# Altium PCB MCU089B.PcbDoc (part 2 of 5)
Units mil, origin at the board's own origin, x right, y up, seen from the top; angles counter-clockwise.
Board outline 2300 x 5500 mil, 4 copper layers (Top Signal, GND, PWR, Bottom Signal), stack 61.6 mil thick; 261 components, 208 nets, 964 pads, 377 vias.
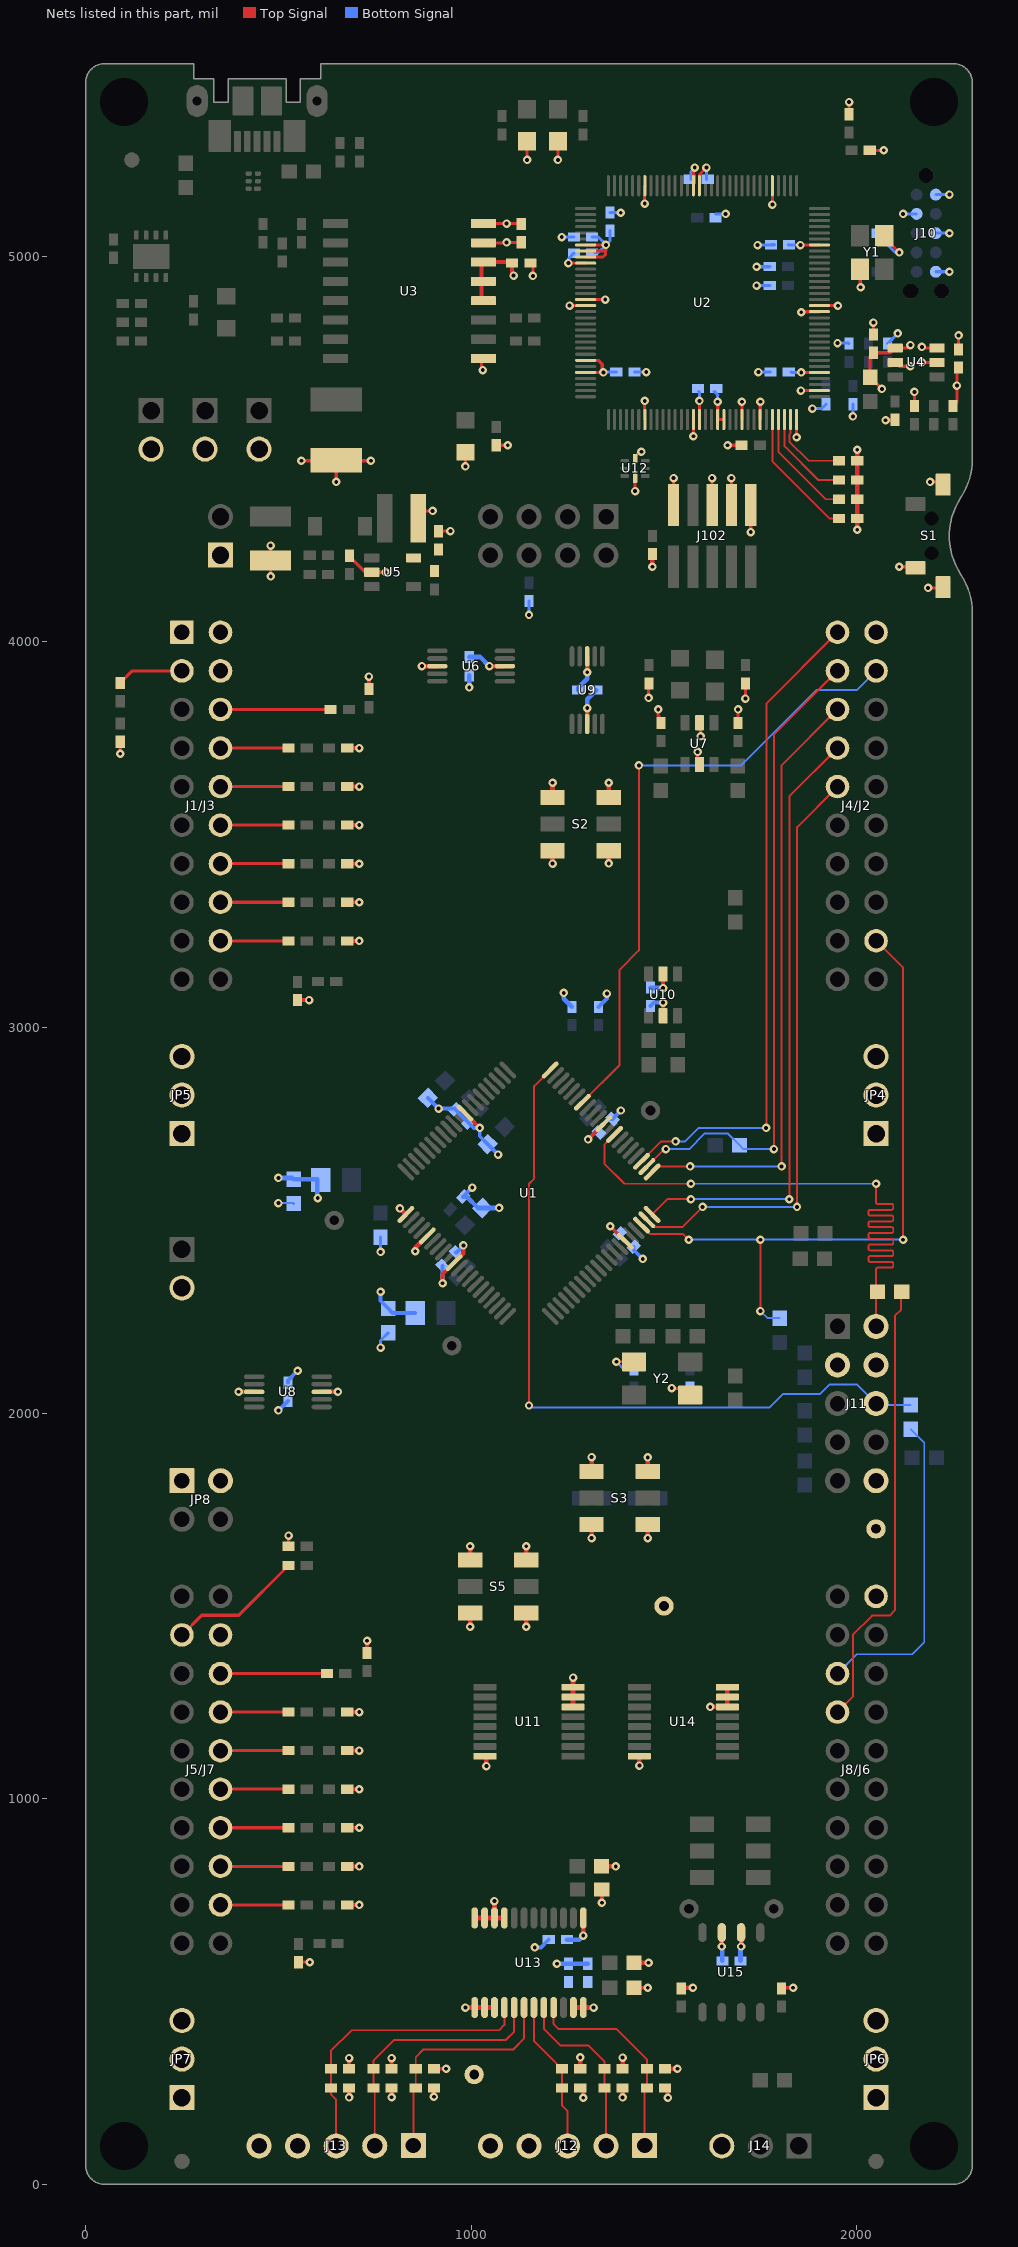
[diagram p4: the nets of this part, all layers, seen from the top]

## Part data
C1 C2 C6 C10 C11 C12 C13 C14 C17 C20 C21 C22 C23 C43 C44 C45 C46 C49 C64 C65 C74 C105 C106: library part CMP-0006629-2, "CAP, CERM, 0.1 uF, 10 V, +/- 10%, X7R, 0402", Cap_Case=0402, Manufacturer=MuRata, Supplier Part Number 1=GRM155R71A104KA01D-ND, TempCo=X7R, Tolerance_%=10%, Value1=Unknown, Value2=10V, ValueDisplayed=0.1uF, AEC Category=Q200, AEC Qualified=?, Cap_F=100nF, ComponentLink1Description="Datasheet link", ComponentLink1URL=http://search.murata.co.jp/Ceramy/PnsearchViewAction.do?HnOFG=ON&HnNFG=ON&SEL_CNT=50&sLang=en&sKey=GRM155R71A104KA01D&x=9&y=9&search=startwith, CompType=Capacitor, LatestRevisionDate=2017-03-09, MountType=SMT, PackageReference=0402, PartNumber=GRM155R71A104KA01D, Polarized=N, Published=2008-06-19, Publisher="Texas Instruments", RoHS=Y, SizeArea_mm2=0.5, SizeAreaWB_mm2=3, SizeX_mm=1, SizeY_mm=0.5, SizeZ_mm=0.6, Supplier 1=Digi-Key, Supplier 2=Newark, Supplier 3=Mouser, Supplier Part Number 2=14T3278, Supplier Part Number 3=81-GRM155R71A104KA1D, TaMax_C=125癈, TaMin_C=-55癈, Technology=Ceramic, U/M=EA, VDC_V=10V
C3: library part CMP-0006404-2, "CAP, CERM, 820 pF, 25 V, +/- 5%, C0G/NP0, 0402", Cap_Case=0402, Manufacturer=MuRata, Supplier Part Number 1=GRM1555C1E821JA01D-ND, TempCo=C0G/NP0, Tolerance_%=5%, Value1=Unknown, Value2=25V, ValueDisplayed=820pF, AEC Category=Q200, AEC Qualified=?, Cap_F=820pF, ComponentLink1Description="Datasheet link", ComponentLink1URL=http://search.murata.co.jp/Ceramy/PnsearchViewAction.do?HnOFG=ON&HnNFG=ON&SEL_CNT=50&sLang=en&sKey=GRM1555C1E821JA01D&x=9&y=9&search=startwith, CompType=Capacitor, LatestRevisionDate=2017-03-09, MountType=SMT, PackageReference=0402, PartNumber=GRM1555C1E821JA01D, Polarized=N, Published=2008-06-19, Publisher="Texas Instruments", RoHS=Y, SizeArea_mm2=0.5, SizeAreaWB_mm2=3, SizeX_mm=1, SizeY_mm=0.5, SizeZ_mm=0.6, Supplier 1=Digi-Key, Supplier 2=Mouser, Supplier Part Number 2=81-GRM1555C1E821JA1D, TaMax_C=125癈, TaMin_C=-55癈, Technology=Ceramic, U/M=EA, VDC_V=25V
C4: library part CMP-0064938-2, "CAP, CERM, 10 uF, 25 V,+/- 10%, X7R, 1210", Cap_Case=1210, Manufacturer="Wurth Elektronik", Supplier Part Number 1=732-7729-1-ND, TempCo=X7R, Tolerance_%=10%, Value1=Unknown, Value2=25V, ValueDisplayed=10uF, AEC Category=Q200, AEC Grade=N/A, AEC Qualified=N, Cap_F=10礔, ComponentLink1Description="Datasheet link", ComponentLink1URL=http://katalog.we-online.de/pbs/datasheet/885012209028.pdf, CompType=Capacitor, LatestRevisionDate=2017-06-05, MountType=SMT, PackageReference=1210, PartNumber=885012209028, Polarized=N, Published=2008-06-19, Publisher="Texas Instruments", RoHS=Y, SizeArea_mm2=8, SizeAreaWB_mm2=14.7, SizeX_mm=3.2, SizeY_mm=2.5, SizeZ_mm=2.2, Supplier 1=Digi-Key, Supplier 2=Newark, Supplier 3=Mouser, Supplier Part Number 2=40Y4457, Supplier Part Number 3=710-885012209028, TaMax_C=125癈, TaMin_C=-55癈, Technology=Ceramic, U/M=EA, VDC_V=25V
C5: library part CMP-0006220-2, "CAP, CERM, 4.7 uF, 6.3 V, +/- 20%, X5R, 0402", Cap_Case=0402, Manufacturer="Wurth Elektronik", Supplier Part Number 1=732-7485-1-ND, TempCo=X5R, Tolerance_%=20%, Value1=Unknown, Value2=6.3V, ValueDisplayed=4.7uF, AEC Category=Q200, AEC Grade=N/A, AEC Qualified=N, Cap_F=4.7礔, ComponentLink1Description="Datasheet link", ComponentLink1URL=http://katalog.we-online.de/pbs/datasheet/885012105008.pdf, CompType=Capacitor, LatestRevisionDate=2017-03-09, MountType=SMT, PackageReference=0402, PartNumber=885012105008, Polarized=N, Published=2008-06-19, Publisher="Texas Instruments", RoHS=Y, SizeArea_mm2=0.5, SizeAreaWB_mm2=3, SizeX_mm=1, SizeY_mm=0.5, SizeZ_mm=0.6, Supplier 1=Digi-Key, Supplier 2=Mouser, Supplier Part Number 2=710-885012105008, TaMax_C=85癈, TaMin_C=-55癈, Technology=Ceramic, U/M=EA, VDC_V=6.3V
C7 C8 C50 C51 C52 C53 C58: library part CMP-0006658-2, "CAP, CERM, 0.01 uF, 25 V, +/- 10%, X7R, 0402", Cap_Case=0402, Manufacturer=MuRata, Supplier Part Number 1=490-1312-1-ND, TempCo=X7R, Tolerance_%=10%, Value1=Unknown, Value2=25V, ValueDisplayed=0.01uF, AEC Category=Q200, AEC Qualified=?, Cap_F=10nF, ComponentLink1Description="Datasheet link", ComponentLink1URL=http://search.murata.co.jp/Ceramy/PnsearchViewAction.do?HnOFG=ON&HnNFG=ON&SEL_CNT=50&sLang=en&sKey=GRM155R71E103KA01D&x=9&y=9&search=startwith, CompType=Capacitor, LatestRevisionDate=2017-03-09, MountType=SMT, PackageReference=0402, PartNumber=GRM155R71E103KA01D, Polarized=N, Published=2008-06-19, Publisher="Texas Instruments", RoHS=Y, SizeArea_mm2=0.5, SizeAreaWB_mm2=3, SizeX_mm=1, SizeY_mm=0.5, SizeZ_mm=0.6, Supplier 1=Digi-Key, Supplier 2=Mouser, Supplier 3=Farnell, Supplier Part Number 2=81-GRM36X103K25, Supplier Part Number 3=8819734, TaMax_C=125癈, TaMin_C=-55癈, Technology=Ceramic, U/M=EA, VDC_V=25V
C9 C18 C19: library part CMP-0007318-5, "CAP, CERM, 10 uF, 10 V, +/- 20%, X5R, 0603", Cap_Case=0603, Manufacturer=MuRata, TempCo=X5R, Tolerance_%=20%, Value1=Unknown, Value2=10V, ValueDisplayed=10uF, AEC Category=Q200, AEC Qualified=?, Cap_F=10礔, ComponentLink1Description="Datasheet link", ComponentLink1URL=http://psearch.murata.com/capacitor/product/GRM188R61A106ME69%23.pdf, CompType=Capacitor, LatestRevisionDate=2017-03-09, MountType=SMT, PackageReference=0603, PartNumber=GRM188R61A106ME69D, Polarized=N, Published=2008-06-19, Publisher="Texas Instruments", RoHS=Y, SizeArea_mm2=1.28, SizeAreaWB_mm2=4.68, SizeX_mm=1.6, SizeY_mm=0.8, SizeZ_mm=1, TaMax_C=85癈, TaMin_C=-55癈, Technology=Ceramic, U/M=EA, VDC_V=10V
C15 C16: library part CMP-0007323-5, "CAP, CERM, 2.2 uF, 10 V, +/- 10%, X5R, 0603", Cap_Case=0603, Manufacturer=MuRata, Supplier Part Number 1=490-1545-1-ND, TempCo=X5R, Tolerance_%=10%, Value1=Unknown, Value2=10V, ValueDisplayed=2.2uF, AEC Category=Q200, AEC Qualified=?, Cap_F=2.2礔, ComponentLink1Description="Datasheet link", ComponentLink1URL=http://search.murata.co.jp/Ceramy/PnsearchViewAction.do?HnOFG=ON&HnNFG=ON&SEL_CNT=50&sLang=en&sKey=GRM188R61A225KE34D&x=9&y=9&search=startwith, CompType=Capacitor, LatestRevisionDate=2017-03-09, MountType=SMT, PackageReference=0603, PartNumber=GRM188R61A225KE34D, Polarized=N, Published=2008-06-19, Publisher="Texas Instruments", RoHS=Y, SizeArea_mm2=1.28, SizeAreaWB_mm2=4.68, SizeX_mm=1.6, SizeY_mm=0.8, SizeZ_mm=1, Supplier 1=Digi-Key, Supplier 2=Mouser, Supplier 3=Farnell, Supplier Part Number 2=81-GRM188R61A225KE34, Supplier Part Number 3=1828799, TaMax_C=85癈, TaMin_C=-55癈, Technology=Ceramic, U/M=EA, VDC_V=10V
C24: library part CMP-0007323-5, "CAP, CERM, 2.2 uF, 10 V, +/- 10%, X5R, 0603", Cap_Case=0603, Manufacturer=MuRata, Supplier Part Number 1=490-1545-1-ND, TempCo=X5R, Tolerance_%=10%, Value1=Unknown, Value2=10V, AEC Category=Q200, AEC Qualified=?, Cap_F=2.2礔, ComponentLink1Description="Datasheet link", ComponentLink1URL=http://search.murata.co.jp/Ceramy/PnsearchViewAction.do?HnOFG=ON&HnNFG=ON&SEL_CNT=50&sLang=en&sKey=GRM188R61A225KE34D&x=9&y=9&search=startwith, CompType=Capacitor, LatestRevisionDate=2017-03-09, MountType=SMT, PackageReference=0603, PartNumber=GRM188R61A225KE34D, Polarized=N, Published=2008-06-19, Publisher="Texas Instruments", RoHS=Y, SizeArea_mm2=1.28, SizeAreaWB_mm2=4.68, SizeX_mm=1.6, SizeY_mm=0.8, SizeZ_mm=1, Supplier 1=Digi-Key, Supplier 2=Mouser, Supplier 3=Farnell, Supplier Part Number 2=81-GRM188R61A225KE34, Supplier Part Number 3=1828799, TaMax_C=85癈, TaMin_C=-55癈, Technology=Ceramic, U/M=EA, VDC_V=10V
C25 C26 C27 C28 C29 C30 C31 C32 C33 C34 C35 C36 C37 C38 C39 C40: library part CMP-0006249-2, "CAP, CERM, 220 pF, 50 V, +/- 1%, C0G/NP0, 0402", Cap_Case=0402, Manufacturer=TDK, Supplier Part Number 1=445-7015-1-ND, TempCo=C0G/NP0, Tolerance_%=1%, Value1=Unknown, Value2=50V, ValueDisplayed=220pF, AEC Category=Q200, AEC Grade=N/A, AEC Qualified=N, Cap_F=220pF, ComponentLink1Description="Datasheet link", ComponentLink1URL=http://www.tdk.com/pdf/tight_tol_B11.pdf, CompType=Capacitor, LatestRevisionDate=2017-03-09, MountType=SMT, PackageReference=0402, PartNumber=C1005C0G1H221F050BA, Polarized=N, Published=2008-06-19, Publisher="Texas Instruments", RoHS=Y, SizeArea_mm2=0.5, SizeAreaWB_mm2=3, SizeX_mm=1, SizeY_mm=0.5, SizeZ_mm=0.6, Supplier 1=Digi-Key, Supplier 2=Newark, Supplier 3=Mouser, Supplier Part Number 2=78Y9893, Supplier Part Number 3=810-C1005C0G1H221F, TaMax_C=125癈, TaMin_C=-55癈, Technology=Ceramic, U/M=EA, VDC_V=50V
C41 C42 C62 C63: library part CMP-0006239-2, "CAP, CERM, 12 pF, 25 V, +/- 5%, C0G/NP0, AEC-Q200 Grade 1, 0402", Cap_Case=0402, Manufacturer=Kemet, Supplier Part Number 1=399-6829-1-ND, TempCo=C0G/NP0, Tolerance_%=5%, Value1=Unknown, Value2=25V, ValueDisplayed=12pF, AEC Category=Q200, AEC Grade=1, AEC Qualified=Y, Cap_F=12pF, ComponentLink1Description="Datasheet link", ComponentLink1URL=http://www.kemet.com/Lists/ProductCatalog/Attachments/420/KEM_C1022_C0G_AUTO_SMD.pdf, CompType=Capacitor, LatestRevisionDate=2017-03-09, MountType=SMT, PackageReference=0402, PartNumber=C0402C120J3GACAUTO, Polarized=N, Published=2008-06-19, Publisher="Texas Instruments", RoHS=Y, SizeArea_mm2=0.5, SizeAreaWB_mm2=3, SizeX_mm=1, SizeY_mm=0.5, SizeZ_mm=0.6, Supplier 1=Digi-Key, Supplier 2=Newark, Supplier 3=Mouser, Supplier Part Number 2=86T2558, Supplier Part Number 3=80-C0402C120J3GAUTO, TaMax_C=125癈, TaMin_C=-55癈, Technology=Ceramic, U/M=EA, VDC_V=25V
C47 C48: library part CMP-0006720-2, "CAP, CERM, 0.1 uF, 25 V, +/- 20%, X7R, 0402", Cap_Case=0402, Manufacturer="Taiyo Yuden", TempCo=X7R, Tolerance_%=20%, Value1=Unknown, Value2=25V, ValueDisplayed=0.1uF, AEC Category=Q200, AEC Grade=N/A, AEC Qualified=N, Cap_F=100nF, ComponentLink1Description="Datasheet link", ComponentLink1URL=http://www.yuden.co.jp/productdata/catalog/en/mlcc_all_e.pdf, CompType=Capacitor, LatestRevisionDate=2017-03-09, MountType=SMT, PackageReference=0402, PartNumber=TMK105B7104MV-FR, Polarized=N, Published=2008-06-19, Publisher="Texas Instruments", RoHS=Y, SizeArea_mm2=0.5, SizeAreaWB_mm2=3, SizeX_mm=1, SizeY_mm=0.5, SizeZ_mm=0.6, TaMax_C=125癈, TaMin_C=-55癈, Technology=Ceramic, U/M=EA, VDC_V=25V
C54 C55 C60 C66: library part CMP-0006623-2, "CAP, CERM, 0.1 uF, 6.3 V, +/- 10%, X7R, 0402", Cap_Case=0402, Manufacturer=MuRata, Supplier Part Number 1=GRM155R70J104KA01D-ND, TempCo=X7R, Tolerance_%=10%, Value1=Unknown, Value2=6.3V, ValueDisplayed=0.1uF, AEC Category=Q200, AEC Qualified=?, Cap_F=100nF, ComponentLink1Description="Datasheet link", ComponentLink1URL=http://search.murata.co.jp/Ceramy/PnsearchViewAction.do?HnOFG=ON&HnNFG=ON&SEL_CNT=50&sLang=en&sKey=GRM155R70J104KA01D&x=9&y=9&search=startwith, CompType=Capacitor, LatestRevisionDate=2017-03-09, MountType=SMT, PackageReference=0402, PartNumber=GRM155R70J104KA01D, Polarized=N, Published=2008-06-19, Publisher="Texas Instruments", RoHS=Y, SizeArea_mm2=0.5, SizeAreaWB_mm2=3, SizeX_mm=1, SizeY_mm=0.5, SizeZ_mm=0.6, Supplier 1=Digi-Key, Supplier 2=Mouser, Supplier Part Number 2=81-GRM155R70J104KA1D, TaMax_C=125癈, TaMin_C=-55癈, Technology=Ceramic, U/M=EA, VDC_V=6.3V
C56 C57 C61: library part CMP-0064924-2, "CAP, CERM, 1 uF, 10 V,+/- 20%, X5R, 0402", Cap_Case=0402, Manufacturer="Wurth Elektronik", Supplier Part Number 1=732-7489-1-ND, TempCo=X5R, Tolerance_%=20%, Value1=Unknown, Value2=10V, ValueDisplayed=1uF, AEC Category=Q200, AEC Grade=N/A, AEC Qualified=N, Cap_F=1礔, ComponentLink1Description="Datasheet link", ComponentLink1URL=http://katalog.we-online.de/pbs/datasheet/885012105012.pdf, CompType=Capacitor, LatestRevisionDate=2017-06-05, MountType=SMT, PackageReference=0402, PartNumber=885012105012, Polarized=N, Published=2008-06-19, Publisher="Texas Instruments", RoHS=Y, SizeArea_mm2=0.5, SizeAreaWB_mm2=3, SizeX_mm=1, SizeY_mm=0.5, SizeZ_mm=0.6, Supplier 1=Digi-Key, Supplier 2=Newark, Supplier 3=Mouser, Supplier Part Number 2=75Y5997, Supplier Part Number 3=710-885012105012, TaMax_C=85癈, TaMin_C=-55癈, Technology=Ceramic, U/M=EA, VDC_V=10V
C59 C100 C103: library part CMP-0006543-2, "CAP, CERM, 2.2 uF, 6.3 V, +/- 10%, X5R, 0402", Cap_Case=0402, Manufacturer=MuRata, Supplier Part Number 1=81-GRM155R60J225KE5D, TempCo=X5R, Tolerance_%=10%, Value1=Unknown, Value2=6.3V, ValueDisplayed=2.2uF, AEC Category=Q200, AEC Grade=N/A, AEC Qualified=N, Cap_F=2.2礔, ComponentLink1Description="Datasheet link", ComponentLink1URL=http://psearch.en.murata.com/capacitor/product/GRM155R60J225KE95%23.pdf, CompType=Capacitor, LatestRevisionDate=2017-03-09, MountType=SMT, PackageReference=0402, PartNumber=GRM155R60J225KE95D, Polarized=N, Published=2008-06-19, Publisher="Texas Instruments", RoHS=Y, SizeArea_mm2=0.5, SizeAreaWB_mm2=3, SizeX_mm=1, SizeY_mm=0.5, SizeZ_mm=0.6, Supplier 1=Mouser, TaMax_C=85癈, TaMin_C=-55癈, Technology=Ceramic, U/M=EA, VDC_V=6.3V
C67 C68 C69 C70 C71 C72 C73: library part CMP-0006231-2, "CAP, CERM, 1000 pF, 50 V, +/- 10%, X7R, 0402", Cap_Case=0402, Manufacturer="Wurth Elektronik", Supplier Part Number 1=732-7556-1-ND, TempCo=X7R, Tolerance_%=10%, Value1=Unknown, Value2=50V, ValueDisplayed=1000pF, AEC Category=Q200, AEC Grade=N/A, AEC Qualified=N, Cap_F=1nF, ComponentLink1Description="Datasheet link", ComponentLink1URL=http://katalog.we-online.de/pbs/datasheet/885012205061.pdf, CompType=Capacitor, LatestRevisionDate=2017-03-09, MountType=SMT, PackageReference=0402, PartNumber=885012205061, Polarized=N, Published=2008-06-19, Publisher="Texas Instruments", RoHS=Y, SizeArea_mm2=0.5, SizeAreaWB_mm2=3, SizeX_mm=1, SizeY_mm=0.5, SizeZ_mm=0.6, Supplier 1=Digi-Key, Supplier 2=Mouser, Supplier Part Number 2=710-885012205061, TaMax_C=125癈, TaMin_C=-55癈, Technology=Ceramic, U/M=EA, VDC_V=50V
C101: library part CMP-0006688-2, "CAP, CERM, 3300 pF, 50 V, +/- 10%, X7R, 0402", Cap_Case=0402, Manufacturer=MuRata, Supplier Part Number 1=490-3248-1-ND, TempCo=X7R, Tolerance_%=10%, Value1=Unknown, Value2=50V, ValueDisplayed=3300pF, AEC Category=Q200, AEC Qualified=?, Cap_F=3.3nF, ComponentLink1Description="Datasheet link", ComponentLink1URL=http://search.murata.co.jp/Ceramy/PnsearchViewAction.do?HnOFG=ON&HnNFG=ON&SEL_CNT=50&sLang=en&sKey=GRM155R71H332KA01D&x=9&y=9&search=startwith, CompType=Capacitor, LatestRevisionDate=2017-03-09, MountType=SMT, PackageReference=0402, PartNumber=GRM155R71H332KA01D, Polarized=N, Published=2008-06-19, Publisher="Texas Instruments", RoHS=Y, SizeArea_mm2=0.5, SizeAreaWB_mm2=3, SizeX_mm=1, SizeY_mm=0.5, SizeZ_mm=0.6, Supplier 1=Digi-Key, Supplier 2=Mouser, Supplier Part Number 2=81-GRM36X332K50, TaMax_C=125癈, TaMin_C=-55癈, Technology=Ceramic, U/M=EA, VDC_V=50V
C102: library part CMP-0006216-2, "CAP, CERM, 15 pF, 50 V, +/- 5%, C0G/NP0, 0402", Cap_Case=0402, Manufacturer="Wurth Elektronik", Supplier Part Number 1=710-885012005056, TempCo=C0G/NP0, Tolerance_%=5%, Value1=Unknown, Value2=50V, ValueDisplayed=15pF, AEC Category=Q200, AEC Grade=N/A, AEC Qualified=N, Cap_F=15pF, ComponentLink1Description="Datasheet link", ComponentLink1URL=http://katalog.we-online.de/pbs/datasheet/885012005056.pdf, CompType=Capacitor, LatestRevisionDate=2017-03-09, MountType=SMT, PackageReference=0402, PartNumber=885012005056, Polarized=N, Published=2008-06-19, Publisher="Texas Instruments", RoHS=Y, SizeArea_mm2=0.5, SizeAreaWB_mm2=3, SizeX_mm=1, SizeY_mm=0.5, SizeZ_mm=0.6, Supplier 1=Mouser, TaMax_C=125癈, TaMin_C=-55癈, Technology=Ceramic, U/M=EA, VDC_V=50V
C104: library part CMP-0009297-2, "CAP, CERM, 0.01 uF, 1500 V, +/- 10%, X7R, 1812", Cap_Case=1812, Manufacturer=AVX, Supplier Part Number 1=478-4735-1-ND, TempCo=X7R, Tolerance_%=10%, Value1="0.05 ohm", Value2=1500V, ValueDisplayed=0.01uF, AEC Category=Q200, AEC Grade=N/A, AEC Qualified=N, Cap_F=10nF, ComponentLink1Description="Datasheet link", ComponentLink1URL=http://datasheets.avx.com/AVX-HV_MLCC.pdf, CompType=Capacitor, ESR_ohm=0.05, LatestRevisionDate=2017-03-09, MountType=SMT, PackageReference=1812, PartNumber=1812SC103KAT1A, Polarized=N, Published=2008-06-19, Publisher="Texas Instruments", RoHS=Y, SizeArea_mm2=14.4, SizeAreaWB_mm2=23.1, SizeX_mm=4.5, SizeY_mm=3.2, SizeZ_mm=1.35, Supplier 1=Digi-Key, Supplier 2=Newark, Supplier 3=Mouser, Supplier Part Number 2=96M1562, Supplier Part Number 3=581-1812SC103KAT1A, TaMax_C=125癈, TaMin_C=-55癈, Technology=Ceramic, U/M=EA, VDC_V=1.5kV
"CE Logo1": library part CMP-0074844-1, LatestRevisionDate=2017-07-06, Lib Reference="CE Mark", PartNumber="CE Mark", Published=2009-03-03, Publisher="Texas Instruments", SymbolCreator=a0412235
D1: library part CMP-0028360-2, "Diode, Schottky, 40 V, 1 A, SOD-123", Manufacturer="Diodes Inc.", Value1=1A, Value2=0.45V, AEC Category=Q101, AEC Qualified=?, ComponentLink1Description="Datasheet link", ComponentLink1URL=http://www.diodes.com/datasheets/ds30217.pdf, CompType=Diode, Green_EU RoHS=Passed, Green_EU RoHS-2=Passed, Green_Lifecycle=Active, Green_REACh=Passed, Io_A=1A, MountType=SMT, PackageReference=SOD-123, PartNumber=1N5819HW-7-F, RoHS=Y, SizeArea_mm2=6.545, SizeAreaWB_mm2=13.095, SizeX_mm=3.85, SizeY_mm=1.7, SizeZ_mm=1.35, TJmax_C=125癈, Type=Schottky, Vf_V=450mV, Vr_V=40V
FID1 FID2 FID3 FID4 FID5 FID6: library part CMP-0077181-1, "Fiducial mark.  There is nothing to buy or mount.", Manufacturer=N/A, ClassName=FiducialMark, CompType=Fiducial, MountType=N/A, PackageReference=N/A, PartNumber=N/A
J1/J3: library part CMP-0003837-4, "Receptacle, 2.54mm, 10x2, Tin, TH", Alternate Manufacturer="Major League Electronics", Alternate PartNumber=CRD-081413-A-G, Manufacturer=Samtec, Supplier Part Number 1=SAM1204-10-ND, ComponentLink1Description="Datasheet Link", ComponentLink1URL=https://www.samtec.com/ftppub/cpdf/SSQ-1XX-XX-XXX-X-XX-XXX-XX-X-MKT.pdf, CompType=Receptacle, Green_EU RoHS=Passed, Green_EU RoHS-2=Passed, Green_Lifecycle=Active, Green_REACh=Incomplete, MountType=TH, Note="Booster Pack 40 pin J1 and J3", PackageReference="10x2 Receptacle", PartNumber=SSQ-110-03-T-D, RoHS=Y, Supplier 1=Digi-Key, Supplier 2=Newark, Supplier Part Number 2=11P8392
J4/J2: library part CMP-0078266-4, "Receptacle, 2.54mm, 10x2, Tin, TH", Alternate Manufacturer="Major League Electronics", Alternate PartNumber=CRD-081413-A-G, Manufacturer=Samtec, Supplier Part Number 1=SAM1204-10-ND, ComponentLink1Description="Datasheet Link", ComponentLink1URL=https://www.samtec.com/ftppub/cpdf/SSQ-1XX-XX-XXX-X-XX-XXX-XX-X-MKT.pdf, CompType=Receptacle, Green_EU RoHS=Passed, Green_EU RoHS-2=Passed, Green_Lifecycle=Active, Green_REACh=Incomplete, MountType=TH, Note="Booster Pack 40 pin J2 and J4", PackageReference="10x2 Receptacle", PartNumber=SSQ-110-03-T-D, RoHS=Y, Supplier 1=Digi-Key, Supplier 2=Newark, Supplier Part Number 2=11P8392
J5/J7: library part CMP-0081070-3, "Receptacle, 2.54mm, 10x2, Tin, TH", Alternate Manufacturer="Major League Electronics", Alternate PartNumber=CRD-081413-A-G, Manufacturer=Samtec, Supplier Part Number 1=SAM1204-10-ND, ComponentLink1Description="Datasheet Link", ComponentLink1URL=https://www.samtec.com/ftppub/cpdf/SSQ-1XX-XX-XXX-X-XX-XXX-XX-X-MKT.pdf, CompType=Receptacle, Green_EU RoHS=Passed, Green_EU RoHS-2=Passed, Green_Lifecycle=Active, Green_REACh=Incomplete, MountType=TH, Note="Booster Pack 40 pin J5 and J7", PackageReference="10x2 Receptacle", PartNumber=SSQ-110-03-T-D, RoHS=Y, Supplier 1=Digi-Key
J8/J6: library part CMP-0081071-3, "Receptacle, 2.54mm, 10x2, Tin, TH", Alternate Manufacturer="Major League Electronics", Alternate PartNumber=CRD-081413-A-G, Manufacturer=Samtec, Supplier Part Number 1=SAM1204-10-ND, ComponentLink1Description="Datasheet Link", ComponentLink1URL=https://www.samtec.com/ftppub/cpdf/SSQ-1XX-XX-XXX-X-XX-XXX-XX-X-MKT.pdf, CompType=Receptacle, Green_EU RoHS=Passed, Green_EU RoHS-2=Passed, Green_Lifecycle=Active, Green_REACh=Incomplete, MountType=TH, Note="Booster Pack 40 pin J6 and J8", PackageReference="10x2 Receptacle", PartNumber=SSQ-110-03-T-D, RoHS=Y, Supplier 1=Digi-Key
J10: library part CMP-0075101-1, "Footprint for Tag-Connect TC2050 No-Legs cables", Manufacturer=Tag-Connect, CNHeader=False, ComponentLink1Description="Datasheet URL", ComponentLink1URL=http://www.tag-connect.com/Materials/TC2050-IDC-430-NL%20Datasheet.pdf, CompType=Receptacle, CT=False, LatestRevisionDate=2017-07-12, MountType=N/A, Note="Footprint only, to mate with Tag-Connect TC2050 No-Legs cables", PackageReference="Footprint for TC2050 No Legs series of cables", PartNumber=TC2050-IDC-NL-FP, Publisher="Texas Instruments"
J11: library part CMP-0075410-2, "Header, 100mil, 5x2, Gold, TH", Color=Black, Current_A=6.3A, Manufacturer=Samtec, Supplier Part Number 1=SAM1028-05-ND, Voltage_V=550V, Cert_CSA=Y, Cert_CULUS=N, Cert_UL=Y, Cert_VDE=N, ClassName=Header, ComponentLink1Description="Datasheet URL", ComponentLink1URL=http://samtec.com/ftppub/pdf/TSW_TH.PDF, CompType=Header, ContactFinish=Gold, Gender=Male, Green_EU RoHS=Passed, Green_EU RoHS-2=Passed, Green_Lifecycle=Active, Green_REACh=Passed, MountType=TH, Orientation=Vertical, PackageReference="5x2 Header", PartNumber=TSW-105-07-G-D, PinCount=10, Pitch_mm=2.54, RoHS=Y, Row_Count=2, RowSpacing_mm=2.54, Shrouded=N, Supplier 1=Digi-Key
J12 J13: library part CMP-0075411-1, "Header, 100mil, 5x1, Gold, TH", Color=Black, Current_A=6.3A, Manufacturer=Samtec, Supplier Part Number 1=SAM1029-05-ND, Voltage_V=550V, Cert_CSA=Y, Cert_CULUS=N, Cert_UL=Y, Cert_VDE=N, ClassName=Header, CNHeader=True, ComponentLink1Description="Datasheet URL", ComponentLink1URL=http://samtec.com/ftppub/pdf/TSW_TH.PDF, CompType=Header, ContactFinish=Gold, CT=False, Gender=Male, Green_EU RoHS=Passed, Green_EU RoHS-2=Passed, Green_Lifecycle=Active, Green_REACh=Passed, LatestRevisionDate=2017-07-12, MountType=TH, Orientation=Vertical, PackageReference="5x1 Header", PartNumber=TSW-105-07-G-S, PinCount=5, Pitch_mm=2.54, Publisher="Texas Instruments", RoHS=Y, Row_Count=1, Shrouded=N, Supplier 1=Digi-Key
J14 JP4 JP5 JP6 JP7: library part CMP-0054796-1, "Header, 2.54 mm, 3x1, Gold, TH", Manufacturer="Wurth Elektronik", Supplier Part Number 1=732-5316-ND, ClassName=Header, CNHeader=TRUE, ComponentLink1Description="Datasheet URL", ComponentLink1URL=http://katalog.we-online.de/em/datasheet/6130xx11121.pdf, CompType=Header, CT=FALSE, Green_EU RoHS=Passed, Green_EU RoHS-2=Incomplete, Green_Lifecycle=Active, Green_REACh=Passed, LatestRevisionDate=26/05/2017, MountType=TH, PackageReference="Header, 2.54mm, 3x1, TH", PartNumber=61300311121, Publisher="Texas Instruments", RoHS=Y, Supplier 1=Digi-Key, Supplier 2=Newark, Supplier 3=Farnell, Supplier Part Number 2=20X0950, Supplier Part Number 3=356154
J15 JP1 JP2 JP3 JP9: library part CMP-0054794-1, "Header, 2.54 mm, 2x1, Gold, TH", Manufacturer="Wurth Elektronik", Supplier Part Number 1=732-5315-ND, ClassName=Header, CNHeader=TRUE, ComponentLink1Description="Datasheet URL", ComponentLink1URL=http://katalog.we-online.de/em/datasheet/6130xx11121.pdf, CompType=Header, CT=FALSE, Green_EU RoHS=Passed, Green_EU RoHS-2=Incomplete, Green_Lifecycle=Active, Green_REACh=Passed, LatestRevisionDate=26/05/2017, MountType=TH, PackageReference="Header, 2.54mm, 2x1, TH", PartNumber=61300211121, Publisher="Texas Instruments", RoHS=Y, Supplier 1=Digi-Key, Supplier 2=Newark, Supplier 3=Mouser, Supplier Part Number 2=20X0948, Supplier Part Number 3=710-61300211121
J101: library part CMP-0075408-2, "Header, 100mil, 4x2, Gold, TH", Color=Black, Current_A=6.3A, Manufacturer=Samtec, Supplier Part Number 1=SAM1028-04-ND, Voltage_V=550V, Cert_CSA=Y, Cert_CULUS=N, Cert_UL=Y, Cert_VDE=N, ClassName=Header, ComponentLink1Description="Datasheet URL", ComponentLink1URL=http://samtec.com/ftppub/pdf/TSW_TH.PDF, CompType=Header, ContactFinish=Gold, Gender=Male, Green_EU RoHS=Passed, Green_EU RoHS-2=Passed, Green_Lifecycle=Active, Green_REACh=Passed, MountType=TH, Orientation=Vertical, PackageReference="4x2 Header", PartNumber=TSW-104-07-G-D, PinCount=8, Pitch_mm=2.54, RoHS=Y, Row_Count=2, RowSpacing_mm=2.54, Shrouded=N, Supplier 1=Digi-Key
J102: library part CMP-0075670-2, "Header (Shrouded), 1.27mm, 5x2, Gold, SMT", Color=Black, Current_A=3.3A, Manufacturer=Samtec, Supplier Part Number 1=SAM8796-ND, Cert_CSA=Y, Cert_UL=Y, ComponentLink1Description="Datasheet URL", ComponentLink1URL=http://suddendocs.samtec.com/prints/ftsh-1xx-xx-xxx-dv-xxx-mkt.pdf, CompType=Header, ContactFinish=Gold, Gender=Male, MountType=SMT, Orientation=Vertical, PackageReference="Header(Shrouded), 1.27mm, 5x2, SMT", PartNumber=FTSH-105-01-F-DV-K, PinCount=10, Pitch_mm=1.27, RoHS=Y, Row_Count=2, RowSpacing_mm=1.27, Shrouded=Y, Supplier 1=Digi-Key, Supplier 2=Newark, Supplier Part Number 2=45P5160
JP8: library part CMP-0075404-1, "Header, 100mil, 2x2, Gold, TH", Color=Black, Current_A=6.3A, Manufacturer=Samtec, Supplier Part Number 1=SAM1028-02-ND, Voltage_V=550V, Cert_CSA=Y, Cert_CULUS=N, Cert_UL=Y, Cert_VDE=N, ClassName=Header, CNHeader=True, ComponentLink1Description="Datasheet URL", ComponentLink1URL=http://samtec.com/ftppub/pdf/TSW_TH.PDF, CompType=Header, ContactFinish=Gold, CT=False, Gender=Male, Green_EU RoHS=Passed, Green_EU RoHS-2=Passed, Green_Lifecycle=Active, Green_REACh=Passed, LatestRevisionDate=2017-07-12, MountType=TH, Orientation=Vertical, PackageReference="2x2 Header", PartNumber=TSW-102-07-G-D, PinCount=4, Pitch_mm=2.54, Publisher="Texas Instruments", RoHS=Y, Row_Count=2, RowSpacing_mm=2.54, Shrouded=N, Supplier 1=Digi-Key
L1: library part CMP-0063754-1, "Inductor, Shielded Drum Core, Ferrite, 3.3 uH, 1.5 A, 0.085 ohm, SMD", Manufacturer="Wurth Elektronik", Supplier Part Number 1=732-2614-1-ND, Value1="0.085 ohm", Value2=1.5A, ValueDisplayed=3.3uH, AEC Category=Q200, AEC Qualified=?, ComponentLink1Description="Datasheet link", ComponentLink1URL=http://katalog.we-online.de/kataloge/eisos/media/pdf/744025003.pdf, CompType=Inductor, DCR_ohm=0.085, Green_EU RoHS=Passed, Green_EU RoHS-2=Incomplete, Green_Lifecycle=Active, Green_REACh=Passed, Imax_A=1.5A, Ind_H=3.3礖, Irms="1.5A @ 40C rise", Isat="1.8A @ 35% inductance drop", LatestRevisionDate=2017-06-02, Material=Ferrite, MountType=SMT, PackageReference="Inductor, 2.8x2.8x2.8mm", PartNumber=744025003, Published=2008-06-26, Publisher="Texas Instruments", RoHS=Y, SizeArea_mm2=7.84, SizeAreaWB_mm2=14.44, SizeX_mm=2.8, SizeY_mm=2.8, SizeZ_mm=3, Supplier 1=Digi-Key, Technology="Shielded Drum Core"
L2: library part CMP-0003093-1, "Ferrite Bead, 60 ohm @ 100 MHz, 3 A, 0805", Manufacturer="Wurth Elektronik", Supplier Part Number 1=732-1612-1-ND, Value1="0.025 ohm", Value2=3A, ValueDisplayed="60 ohm", ComponentLink1Description="Datasheet link", ComponentLink1URL=http://katalog.we-online.de/pbs/datasheet/742792063.pdf, CompType="Ferrite Bead", DCR_ohm=0.025, Imax_A=3A, LatestRevisionDate=2017-03-09, MountType=SMT, PackageReference=0805, PartNumber=742792063, Published=2014-04-30, Publisher="Texas Instruments", RoHS=Y, SizeArea_mm2=2.5, SizeAreaWB_mm2=6.75, SizeX_mm=2, SizeY_mm=1.25, SizeZ_mm=1.45, Supplier 1=Digi-Key, Supplier 2=Mouser, Supplier Part Number 2=710-742792063, Ztyp@1GHz_Ohm=95.384, ZTyp@100MHz_Ohm=60
L3: library part CMP-0003073-1, "Ferrite Bead, 220 ohm @ 100 MHz, 2 A, 0805", Manufacturer="Wurth Elektronik", Supplier Part Number 1=732-1614-1-ND, Value1="0.05 ohm", Value2=2A, ValueDisplayed="220 ohm", ComponentLink1Description="Datasheet link", ComponentLink1URL=http://katalog.we-online.de/pbs/datasheet/742792022.pdf, CompType="Ferrite Bead", DCR_ohm=0.05, Imax_A=2A, LatestRevisionDate=2017-03-09, MountType=SMT, PackageReference=0805, PartNumber=742792022, Published=2014-04-30, Publisher="Texas Instruments", RoHS=Y, SizeArea_mm2=2.5, SizeAreaWB_mm2=6.75, SizeX_mm=2, SizeY_mm=1.25, SizeZ_mm=1.45, Supplier 1=Digi-Key, Supplier 2=Mouser, Supplier Part Number 2=710-742792022, Ztyp@1GHz_Ohm=190.289, ZTyp@100MHz_Ohm=220
L100 L101: library part CMP-0003183-2, "Ferrite Bead, 100 ohm @ 100 MHz, 0.5 A, 0603", Manufacturer="Wurth Elektronik", Supplier Part Number 1=732-1579-1-ND, Value1="0.15 ohm", Value2=0.5A, ValueDisplayed="100 ohm", ComponentLink1Description="Datasheet link", ComponentLink1URL=http://katalog.we-online.de/pbs/datasheet/742792620.pdf, CompType="Ferrite Bead", DCR_ohm=1.5d, Imax_A=5dA, LatestRevisionDate=2017-03-09, MountType=SMT, PackageReference=0603, PartNumber=742792620, Published=2014-04-30, Publisher="Texas Instruments", RoHS=Y, SizeArea_mm2=1.28, SizeAreaWB_mm2=4.68, SizeX_mm=1.6, SizeY_mm=0.8, SizeZ_mm=1, Supplier 1=Digi-Key, Supplier 2=Mouser, Supplier Part Number 2=710-742792620, Ztyp@1GHz_Ohm=137.267, ZTyp@100MHz_Ohm=100
LED0 LED1 LED4: library part CMP-0002951-3, "LED, Red, SMD", Color=Red, Manufacturer="Wurth Elektronik", Power_TotalModule=72mW, Value1=0.072W, Value2=1.9V, Angle=140, ComponentLink1Description="Datasheet link", ComponentLink1URL=http://katalog.we-online.de/led/datasheet/150080SS75000.pdf, CompType=LED, Io_A=30mA, Ir_A=25礎, MountType=SMT, PackageReference=LED_0805, PartNumber=150080SS75000, RoHS=Y, TJmax_C=85癈, Type=AlInGaP, Vf_V=1.9V, Vr_V=5V
LED2 LED3: library part CMP-0002889-2, "LED, Blue, SMD", Color=Blue, Manufacturer=Lite-On, Value1=W, Value2=3.3V, ComponentLink1Description="Datasheet link", ComponentLink1URL=http://optoelectronics.liteon.com/upload/download/DS-22-99-0226/S_110_LTST-C170TBKT.pdf, CompType=LED, Io_A=20mA, MountType=SMT, PackageReference=LED_0805, PartNumber=LTST-C170TBKT, RoHS=Y, Type=AlInGaP, Vf_V=3.3V
LED5: library part CMP-0002830-3, "LED, Green, SMD", Color=green, Manufacturer=Lite-On, Value1=W, Value2=2.1V, ComponentLink1Description="Datasheet link", ComponentLink1URL=https://sps06.itg.ti.com/sites/KMS/crossdivteams/altium/docs/ComponentDatasheets/LTST-C171GKT.pdf, CompType=LED, Io_A=20A, MountType=SMT, PackageReference="0805 LED", PartNumber=LTST-C171GKT, RoHS=Y, SizeArea_mm2=2.5, SizeAreaWB_mm2=6.75, SizeX_mm=2, SizeY_mm=1.25, SizeZ_mm=1.2, Type=AlInGaP, Vf_V=2.1V
Logo1 Logo5: library part CMP-0074838-1, "Texas Instrument Corporate Signature", ClassName=Logo, LatestRevisionDate=2017-07-06, Lib Reference=TI_Logo, PartNumber="Texas Instruments", Published=2009-03-03, Publisher="Texas Instruments", SymbolCreator=a0412235, SymbolVersion=2011-08-22
Logo3: library part CMP-0074847-1, "FCC_disclaimer", LatestRevisionDate=2017-07-06, Lib Reference=FCC_disclaimer, PartNumber="FCC disclaimer", Published=2009-03-03, Publisher="Texas Instruments"
Logo4: library part CMP-0074769-1, Lib Reference="WEEE logo", PartNumber="WEEE logo"
M1 M2 M3 M4 M5 M6 M7 M8 M9: library part CMP-0003761-2, "Shunt, 2.54mm, Gold, Black", Manufacturer="Wurth Elektronik", Supplier Part Number 1=732-2678-ND, ClassName=Shunt, ComponentLink1Description="Datasheet Link", ComponentLink1URL=http://katalog.we-online.de/em/datasheet/60900213421.pdf, CompType=Shunt, MountType=N/A, PackageReference="Shunt, 2.54mm, Black", PartNumber=60900213421, RoHS=Y, Supplier 1=Digi-Key, Supplier 2=Newark, Supplier 3=Mouser, Supplier Part Number 2=16T0609, Supplier Part Number 3=710-60900213421
MH1 MH2 MH3 MH4: library part CMP-0078424-2, "PCB Mounting Hole, No Pad", Manufacturer=Any, PartNumber=N/A, CompType="Mounting Hole", Key="Mounting Hole (non-standard) No Pad", MountType=N/A, PackageReference="Mounting Hole"
R1 R2 R103 R104: library part CMP-0027004-2, "RES, 0, 5%, 0.063 W, 0402", Manufacturer="Yageo America", Power_W=63mW, Supplier Part Number 1=311-0.0JRCT-ND, TempCo="200 ppm/C", Tolerance_%=5%, Value2=0.063W, Value_Code=0000, ValueDisplayed=0, AEC Category=Q200, AEC Qualified=?, ComponentLink1Description="Datasheet link", ComponentLink1URL=http://www.yageo.com/pdf/Pu-RC0402_51_PbFree_L_2.pdf, CompType=Resistor, EIA_Code=E24, LatestRevisionDate=2017-03-09, MountType=SMT, PackageReference=0402, PartNumber=RC0402JR-070RL, Published=2008-06-26, Publisher="Texas Instruments", Res_ohm=0, RoHS=Y, SizeArea_mm2=0.5, SizeX_mm=1, SizeY_mm=0.5, SizeZ_mm=0.6, Supplier 1=Digi-Key, Supplier 2=Mouser, Supplier 3=Farnell, Supplier Part Number 2=603-RC0402JR-070RL, Supplier Part Number 3=9232516, Technology="Thick Film", U/M=EA, Value1=5%, VDC_V=50V
R3 R28 R29 R105: library part CMP-0026962-3, "RES, 680, 5%, 0.063 W, AEC-Q200 Grade 0, 0402", Manufacturer=Vishay-Dale, Power_W=63mW, Supplier Part Number 1=541-680JCT-ND, TempCo="200 ppm/C", Tolerance_%=5%, Value2=0.063W, Value_Code=680R, ValueDisplayed=680, AEC Category=Q200, AEC Grade=0, AEC Qualified=Y, ComponentLink1Description="Datasheet link", ComponentLink1URL=http://www.vishay.com/docs/20035/dcrcwe3.pdf, CompType=Resistor, EIA_Code=E24, MountType=SMT, PackageReference=0402, PartNumber=CRCW0402680RJNED, Res_ohm=680, RoHS=E, SizeArea_mm2=0.5, SizeX_mm=1, SizeY_mm=0.5, SizeZ_mm=0.6, Supplier 1=Digi-Key, Supplier 2=Newark, Supplier 3=Mouser, Supplier Part Number 2=59M6744, Supplier Part Number 3=71-CRCW0402J-680-E3, Technology="Thick Film", Value1=5%, VDC_V=50V
R4 R10 R11: library part CMP-0026890-5, "RES, 2.2 k, 5%, 0.063 W, AEC-Q200 Grade 0, 0402", Manufacturer=Vishay-Dale, Power_W=63mW, Supplier Part Number 1=541-2.2KJCT-ND, TempCo="200 ppm/C", Tolerance_%=5%, Value2=0.063W, Value_Code=2k20, ValueDisplayed=2.2k, AEC Category=Q200, AEC Grade=0, AEC Qualified=Y, ComponentLink1Description="Datasheet link", ComponentLink1URL=http://www.vishay.com/docs/20035/dcrcwe3.pdf, CompType=Resistor, EIA_Code=E24, MountType=SMT, PackageReference=0402, PartNumber=CRCW04022K20JNED, Res_ohm=2.2k, RoHS=E, SizeArea_mm2=0.5, SizeX_mm=1, SizeY_mm=0.5, SizeZ_mm=0.6, Supplier 1=Digi-Key, Supplier 2=Newark, Supplier 3=Mouser, Supplier Part Number 2=59M6710, Supplier Part Number 3=71-CRCW0402J-2.2K-E3, Technology="Thick Film", Value1=5%, VDC_V=50V
R5: library part CMP-0026822-3, "RES, 0, 5%, 0.063 W, AEC-Q200 Grade 0, 0402", Manufacturer=Vishay-Dale, Power_W=63mW, Supplier Part Number 1=541-0.0JCT-ND, TempCo="200 ppm/C", Tolerance_%=5%, Value2=0.063W, Value_Code=0000, ValueDisplayed=0, AEC Category=Q200, AEC Grade=0, AEC Qualified=Y, ComponentLink1Description="Datasheet link", ComponentLink1URL=http://www.vishay.com/docs/20035/dcrcwe3.pdf, CompType=Resistor, EIA_Code=E24, MountType=SMT, PackageReference=0402, PartNumber=CRCW04020000Z0ED, Res_ohm=0, RoHS=E, SizeArea_mm2=0.5, SizeX_mm=1, SizeY_mm=0.5, SizeZ_mm=0.6, Supplier 1=Digi-Key, Supplier 2=Newark, Supplier 3=Mouser, Supplier Part Number 2=52K6543, Supplier Part Number 3=71-CRCW0402-0-E3, Technology="Thick Film", Value1=5%, VDC_V=50V
R6 R48: library part CMP-0025769-4, "RES, 2.2 k, 5%, 0.1 W, AEC-Q200 Grade 0, 0603", Manufacturer=Vishay-Dale, Power_W=100mW, Supplier Part Number 1=541-2.2KGCT-ND, TempCo="200 ppm/C", Tolerance_%=5%, Value2=0.1W, Value_Code=2k20, ValueDisplayed=2.2k, AEC Category=Q200, AEC Grade=0, AEC Qualified=Y, ComponentLink1Description="Datasheet link", ComponentLink1URL=http://www.vishay.com/docs/20035/dcrcwe3.pdf, CompType=Resistor, EIA_Code=E24, MountType=SMT, PackageReference=0603, PartNumber=CRCW06032K20JNEA, Res_ohm=2.2k, RoHS=E, SizeArea_mm2=1.28, SizeX_mm=1.6, SizeY_mm=0.8, SizeZ_mm=1, Supplier 1=Digi-Key, Supplier 2=Newark, Supplier 3=Farnell, Supplier Part Number 2=59M6776, Supplier Part Number 3=1652868, Technology="Thick Film", Value1=5%, VDC_V=75V
R7: library part CMP-0026730-1, "RES, 30.1 k, 1%, 0.063 W, 0402", Manufacturer="Yageo America", Power_W=63mW, Supplier Part Number 1=311-30.1KLRCT-ND, TempCo="100 ppm/C", Tolerance_%=1%, Value2=0.063W, Value_Code=30k1, ValueDisplayed=30.1k, AEC Category=Q200, AEC Grade=N/A, AEC Qualified=N, ComponentLink1Description="Datasheet link", ComponentLink1URL=http://www.yageo.com/documents/recent/PYu-RC_Group_51_RoHS_L_04.pdf, CompType=Resistor, EIA_Code=E96, LatestRevisionDate=2017-03-09, MountType=SMT, PackageReference=0402, PartNumber=RC0402FR-0730K1L, Published=2008-06-26, Publisher="Texas Instruments", Res_ohm=30.1k, RoHS=Y, SizeArea_mm2=0.5, SizeX_mm=1, SizeY_mm=0.5, SizeZ_mm=0.6, Supplier 1=Digi-Key, Supplier 2=Newark, Supplier 3=Mouser, Supplier Part Number 2=18X9891, Supplier Part Number 3=603-RC0402FR-0730K1, Technology="Thick Film", U/M=EA, Value1=1%, VDC_V=50V
R8 R9 R65 R67 R78 R80: library part CMP-0026825-5, "RES, 10 k, 5%, 0.063 W, AEC-Q200 Grade 0, 0402", Manufacturer=Vishay-Dale, Power_W=63mW, Supplier Part Number 1=541-10KJCT-ND, TempCo="200 ppm/C", Tolerance_%=5%, Value2=0.063W, Value_Code=10k0, ValueDisplayed=10k, AEC Category=Q200, AEC Grade=0, AEC Qualified=Y, ComponentLink1Description="Datasheet link", ComponentLink1URL=http://www.vishay.com/docs/20035/dcrcwe3.pdf, CompType=Resistor, EIA_Code=E24, MountType=SMT, PackageReference=0402, PartNumber=CRCW040210K0JNED, Res_ohm=10k, RoHS=E, SizeArea_mm2=0.5, SizeX_mm=1, SizeY_mm=0.5, SizeZ_mm=0.6, Supplier 1=Digi-Key, Supplier 2=Newark, Supplier 3=Mouser, Supplier Part Number 2=59M6696, Supplier Part Number 3=71-CRCW0402J-10K-E3, Technology="Thick Film", Value1=5%, VDC_V=50V
R12 R13 R14 R15 R16 R17 R18 R19 R20 R21 R22 R23 R24 R25 R26 R27: library part CMP-0026992-3, "RES, 0, 5%, 0.1 W, AEC-Q200 Grade 0, 0402", Manufacturer=Panasonic, Power_W=100mW, Supplier Part Number 1=P0.0JCT-ND, TempCo="600 ppm/C", Tolerance_%=5%, Value2=0.1W, Value_Code=0000, ValueDisplayed=0, AEC Category=Q200, AEC Grade=0, AEC Qualified=Y, ComponentLink1Description="Datasheet link", ComponentLink1URL=https://industrial.panasonic.com/cdbs/www-data/pdf/RDA0000/AOA0000C301.pdf, CompType=Resistor, EIA_Code=E24, MountType=SMT, PackageReference=0402, PartNumber=ERJ-2GE0R00X, Res_ohm=0, RoHS=Y, SizeArea_mm2=0.5, SizeAreaWB_mm2=3, SizeX_mm=1, SizeY_mm=0.5, SizeZ_mm=0.6, Supplier 1=Digi-Key, Supplier 2=Newark, Supplier 3=Mouser, Supplier Part Number 2=65T8307, Supplier Part Number 3=667-ERJ-2GE0R00X, Technology="Thick Film", Value1=5%, VDC_V=50V
R30 R31: library part CMP-0026826-2, "RES, 10 M, 5%, 0.063 W, AEC-Q200 Grade 0, 0402", Manufacturer=Vishay-Dale, Power_W=63mW, Supplier Part Number 1=541-10MJCT-ND, TempCo="200 ppm/C", Tolerance_%=5%, Value2=0.063W, Value_Code=10M0, ValueDisplayed=10M, AEC Category=Q200, AEC Grade=0, AEC Qualified=Y, ComponentLink1Description="Datasheet link", ComponentLink1URL=http://www.vishay.com/docs/20035/dcrcwe3.pdf, CompType=Resistor, EIA_Code=E24, MountType=SMT, PackageReference=0402, PartNumber=CRCW040210M0JNED, Res_ohm=10M, RoHS=E, SizeArea_mm2=0.5, SizeX_mm=1, SizeY_mm=0.5, SizeZ_mm=0.6, Supplier 1=Digi-Key, Supplier 2=Newark, Supplier 3=Mouser, Supplier Part Number 2=59M6697, Supplier Part Number 3=71-CRCW0402J-10M-E3, Technology="Thick Film", Value1=5%, VDC_V=50V
R32 R33 R34 R35 R36 R37 R42 R43 R44 R45 R46 R47 R49 R50 R51 R52 R53 R54 R55 R56 R69 R71 R81: library part CMP-0025697-4, "RES, 0, 5%, 0.1 W, AEC-Q200 Grade 0, 0603", Manufacturer=Vishay-Dale, Power_W=100mW, Supplier Part Number 1=541-0.0GCT-ND, TempCo="200 ppm/C", Tolerance_%=5%, Value2=0.1W, Value_Code=0000, ValueDisplayed=0, AEC Category=Q200, AEC Grade=0, AEC Qualified=Y, ComponentLink1Description="Datasheet link", ComponentLink1URL=http://www.vishay.com/docs/20035/dcrcwe3.pdf, CompType=Resistor, EIA_Code=E24, MountType=SMT, PackageReference=0603, PartNumber=CRCW06030000Z0EA, Res_ohm=0, RoHS=E, SizeArea_mm2=1.28, SizeX_mm=1.6, SizeY_mm=0.8, SizeZ_mm=1, Supplier 1=Digi-Key, Supplier 2=Newark, Supplier 3=Mouser, Supplier Part Number 2=52K8014, Supplier Part Number 3=71-CRCW0603-0-E3, Technology="Thick Film", Value1=5%, VDC_V=75V
R38 R39: library part CMP-0022746-5, "RES, 10.0 k, 1%, 0.1 W, 0603", Manufacturer=Yageo, Power_W=100mW, Supplier Part Number 1=311-10.0KHRCT-ND, TempCo="100 ppm/C", Tolerance_%=1%, Value2=0.1W, Value_Code=10k0, ValueDisplayed=10.0k, AEC Category=Q200, AEC Grade=N/A, AEC Qualified=N, ComponentLink1Description="Datasheet link", ComponentLink1URL=http://www.yageo.com/pdf/Pu-RC0603_51_PbFree_L_2.pdf, CompType=Resistor, EIA_Code=E96, MountType=SMT, PackageReference=0603, PartNumber=RC0603FR-0710KL, Res_ohm=10k, RoHS=Y, SizeArea_mm2=1.28, SizeAreaWB_mm2=4.68, SizeX_mm=1.6, SizeY_mm=0.8, SizeZ_mm=1, Supplier 1=Digi-Key, Supplier 2=Mouser, Supplier 3=Farnell, Supplier Part Number 2=603-RC0603FR-0710KL, Supplier Part Number 3=9238603, Technology="Thick Film", Value1=1%, VDC_V=75V
R40 R41 R58 R59 R60 R61 R72 R73 R74 R75 R76 R77: library part CMP-0026071-3, "RES, 1.00 k, 1%, 0.063 W, AEC-Q200 Grade 0, 0402", Manufacturer=Vishay-Dale, Power_W=63mW, Supplier Part Number 1=541-1.00KLCT-ND, TempCo="100 ppm/C", Tolerance_%=1%, Value2=0.063W, Value_Code=1k00, ValueDisplayed=1.00k, AEC Category=Q200, AEC Grade=0, AEC Qualified=Y, ComponentLink1Description="Datasheet link", ComponentLink1URL=http://www.vishay.com/docs/20035/dcrcwe3.pdf, CompType=Resistor, EIA_Code=E96, MountType=SMT, PackageReference=0402, PartNumber=CRCW04021K00FKED, Res_ohm=1k, RoHS=E, SizeArea_mm2=0.5, SizeX_mm=1, SizeY_mm=0.5, SizeZ_mm=0.6, Supplier 1=Digi-Key, Supplier 2=Newark, Supplier 3=Mouser, Supplier Part Number 2=52K6545, Supplier Part Number 3=71-CRCW0402-1.0K-E3, Technology="Thick Film", Value1=1%, VDC_V=50V
R57: library part CMP-0026918-5, "RES, 3.3 k, 5%, 0.063 W, AEC-Q200 Grade 0, 0402", Manufacturer=Vishay-Dale, Power_W=63mW, Supplier Part Number 1=541-3.3KJCT-ND, TempCo="200 ppm/C", Tolerance_%=5%, Value2=0.063W, Value_Code=3k30, ValueDisplayed=3.3k, AEC Category=Q200, AEC Grade=0, AEC Qualified=Y, ComponentLink1Description="Datasheet link", ComponentLink1URL=http://www.vishay.com/docs/20035/dcrcwe3.pdf, CompType=Resistor, EIA_Code=E24, MountType=SMT, PackageReference=0402, PartNumber=CRCW04023K30JNED, Res_ohm=3.3k, RoHS=E, SizeArea_mm2=0.5, SizeX_mm=1, SizeY_mm=0.5, SizeZ_mm=0.6, Supplier 1=Digi-Key, Supplier 2=Newark, Supplier 3=Mouser, Supplier Part Number 2=59M6723, Supplier Part Number 3=71-CRCW0402J-3.3K-E3, Technology="Thick Film", Value1=5%, VDC_V=50V
R62 R66: library part CMP-0026824-3, "RES, 100, 5%, 0.063 W, AEC-Q200 Grade 0, 0402", Manufacturer=Vishay-Dale, Power_W=63mW, Supplier Part Number 1=541-100JCT-ND, TempCo="200 ppm/C", Tolerance_%=5%, Value2=0.063W, Value_Code=100R, ValueDisplayed=100, AEC Category=Q200, AEC Grade=0, AEC Qualified=Y, ComponentLink1Description="Datasheet link", ComponentLink1URL=http://www.vishay.com/docs/20035/dcrcwe3.pdf, CompType=Resistor, EIA_Code=E24, MountType=SMT, PackageReference=0402, PartNumber=CRCW0402100RJNED, Res_ohm=100, RoHS=E, SizeArea_mm2=0.5, SizeX_mm=1, SizeY_mm=0.5, SizeZ_mm=0.6, Supplier 1=Digi-Key, Supplier 2=Newark, Supplier 3=Mouser, Supplier Part Number 2=59M6700, Supplier Part Number 3=71-CRCW0402J-100-E3, Technology="Thick Film", Value1=5%, VDC_V=50V
R63 R64: library part CMP-0026699-1, "RES, 470, 1%, 0.1 W, AEC-Q200 Grade 0, 0402", Manufacturer=Panasonic, Power_W=100mW, Supplier Part Number 1=P470LCT-ND, TempCo="100 ppm/C", Tolerance_%=1%, Value2=0.1W, Value_Code=470R, ValueDisplayed=470, AEC Category=Q200, AEC Grade=0, AEC Qualified=Y, ComponentLink1Description="Datasheet link", ComponentLink1URL=http://industrial.panasonic.com/lecs/www-data/pdf/AOA0000/AOA0000CE2.pdf, CompType=Resistor, LatestRevisionDate=2017-03-09, MountType=SMT, PackageReference=0402, PartNumber=ERJ-2RKF4700X, Published=2008-06-26, Publisher="Texas Instruments", Res_ohm=470, RoHS=Y, SizeArea_mm2=0.5, SizeX_mm=1, SizeY_mm=0.5, SizeZ_mm=0.6, Supplier 1=Digi-Key, Supplier 2=Mouser, Supplier 3=Farnell, Supplier Part Number 2=667-ERJ-2RKF4700X, Supplier Part Number 3=2397145, Technology="Thick Film", U/M=EA, Value1=1%, VDC_V=50V
R68: library part CMP-0026413-2, "RES, 4.87 k, 1%, 0.063 W, AEC-Q200 Grade 0, 0402", Manufacturer=Vishay-Dale, Power_W=63mW, Supplier Part Number 1=541-4.87KLCT-ND, TempCo="100 ppm/C", Tolerance_%=1%, Value2=0.063W, Value_Code=4k87, ValueDisplayed=4.87k, AEC Category=Q200, AEC Grade=0, AEC Qualified=Y, ComponentLink1Description="Datasheet link", ComponentLink1URL=http://www.vishay.com/docs/20035/dcrcwe3.pdf, CompType=Resistor, EIA_Code=E96, MountType=SMT, PackageReference=0402, PartNumber=CRCW04024K87FKED, Res_ohm=4.87k, RoHS=E, SizeArea_mm2=0.5, SizeX_mm=1, SizeY_mm=0.5, SizeZ_mm=0.6, Supplier 1=Digi-Key, Supplier 2=Newark, Supplier 3=Mouser, Supplier Part Number 2=52K7047, Supplier Part Number 3=71-CRCW0402-4.87K-E3, Technology="Thick Film", Value1=1%, VDC_V=50V
R70: library part CMP-0026946-3, "RES, 51, 5%, 0.063 W, AEC-Q200 Grade 0, 0402", Manufacturer=Vishay-Dale, Power_W=63mW, Supplier Part Number 1=541-51JCT-ND, TempCo="200 ppm/C", Tolerance_%=5%, Value2=0.063W, Value_Code=51R0, ValueDisplayed=51, AEC Category=Q200, AEC Grade=0, AEC Qualified=Y, ComponentLink1Description="Datasheet link", ComponentLink1URL=http://www.vishay.com/docs/20035/dcrcwe3.pdf, CompType=Resistor, EIA_Code=E24, MountType=SMT, PackageReference=0402, PartNumber=CRCW040251R0JNED, Res_ohm=51, RoHS=E, SizeArea_mm2=0.5, SizeX_mm=1, SizeY_mm=0.5, SizeZ_mm=0.6, Supplier 1=Digi-Key, Supplier 2=Newark, Supplier 3=Mouser, Supplier Part Number 2=72M6804, Supplier Part Number 3=71-CRCW0402J-51-E3, Technology="Thick Film", Value1=5%, VDC_V=50V
R79: library part CMP-0022769-3, "RES, 120, 1%, 0.1 W, 0603", Manufacturer="Yageo America", Power_W=100mW, Supplier Part Number 1=311-120HRCT-ND, TempCo="200 ppm/C", Tolerance_%=1%, Value2=0.1W, Value_Code=120R, ValueDisplayed=120, AEC Category=Q200, AEC Qualified=?, ComponentLink1Description="Datasheet link", ComponentLink1URL=http://www.yageo.com/pdf/Pu-RC0603_51_PbFree_L_2.pdf, CompType=Resistor, LatestRevisionDate=2017-03-09, MountType=SMT, PackageReference=0603, PartNumber=RC0603FR-07120RL, Published=2008-06-26, Publisher="Texas Instruments", Res_ohm=120, RoHS=Y, SizeArea_mm2=1.28, SizeX_mm=1.6, SizeY_mm=0.8, SizeZ_mm=1, Supplier 1=Digi-Key, Supplier 2=Mouser, Supplier 3=Farnell, Supplier Part Number 2=603-RC0603FR-07120RL, Supplier Part Number 3=9238379, Technology="Thick Film", U/M=EA, Value1=1%, VDC_V=150V
R100: library part CMP-0026100-2, "RES, 1.00 M, 1%, 0.063 W, AEC-Q200 Grade 0, 0402", Manufacturer=Vishay-Dale, Power_W=63mW, Supplier Part Number 1=541-1.00MLCT-ND, TempCo="100 ppm/C", Tolerance_%=1%, Value2=0.063W, Value_Code=1M00, ValueDisplayed=1.00M, AEC Category=Q200, AEC Grade=0, AEC Qualified=Y, ComponentLink1Description="Datasheet link", ComponentLink1URL=http://www.vishay.com/docs/20035/dcrcwe3.pdf, CompType=Resistor, EIA_Code=E96, MountType=SMT, PackageReference=0402, PartNumber=CRCW04021M00FKED, Res_ohm=1M, RoHS=E, SizeArea_mm2=0.5, SizeX_mm=1, SizeY_mm=0.5, SizeZ_mm=0.6, Supplier 1=Digi-Key, Supplier 2=Newark, Supplier 3=Mouser, Supplier Part Number 2=52K6593, Supplier Part Number 3=71-CRCW0402-1.0M-E3, Technology="Thick Film", Value1=1%, VDC_V=50V
R101: library part CMP-0088102-2, "RES Thick Film SMD 51kΩ 1% 1/16W 0402 100ppm/K", Manufacturer=Vishay, Power_W=63mW, Tolerance_%=1%, ValueDisplayed=51k, AEC Grade="Grade 0", AEC Qualified=Yes, ComponentLink1Description=Datasheet, ComponentLink1URL=http://www.vishay.com/docs/20035/dcrcwe3.pdf, PackageReference=0402, PartNumber=CRCW040251K0FKED, Res_ohm=51k, RoHS=TRUE, SizeArea_mm2=0.5, SizeX_mm=1, SizeY_mm=0.5, SizeZ_mm=0.6, Technology="Thick Film", VDC_V=50V
R102: library part CMP-0078244-2, "RES, 30.0 k, 1%, 0.063 W, AEC-Q200 Grade 0, 0402", Manufacturer=Vishay-Dale, Power_W=63mW, Supplier Part Number 1=541-30.0KLCT-ND, TempCo="100 ppm/C", Tolerance_%=1%, Value2=0.063W, Value_Code=30k0, ValueDisplayed=30.0k, AEC Category=Q200, AEC Grade=0, AEC Qualified=Y, ComponentLink1Description="Datasheet link", ComponentLink1URL=http://www.vishay.com/docs/20035/dcrcwe3.pdf, CompType=Resistor, Green_EU RoHS="Passed with Exemption", Green_EU RoHS-2=Passed, Green_Lifecycle=Active, Green_REACh=Passed, MountType=SMT, PackageReference=0402, PartNumber=CRCW040230K0FKED, Res_ohm=30k, RoHS=E, SizeArea_mm2=0.5, SizeX_mm=1, SizeY_mm=0.5, SizeZ_mm=0.6, Supplier 1=Digi-Key, Supplier 2=Newark, Supplier 3=Mouser, Supplier Part Number 2=52K6953, Supplier Part Number 3=71-CRCW0402-30K-E3, Technology="Thick Film", Value1=1%, VDC_V=50V
S1: library part CMP-0002328-1, "Switch, SPST, 0.05 A, 12 VDC, SMD", CurrentRating_mA=50A, Manufacturer=Diptronics, Circuit=SPST, ComponentLink1Description="Datasheet URL", ComponentLink1URL=http://www.dip.com.tw/en/en-product-information/en-switch004/item/download/1976_b080c057386714e3a6604cbe658b9df3, CompType=Switch, LatestRevisionDate=2017-03-09, MountType=SMT, Orientation="Side Actuated", PackageReference=7.8x3.5mm, PartNumber=1188E-1K2-V-TR, PositionCount=1, Publisher="Texas Instruments", RoHS=Y, SizeArea_mm2=27.3, SizeAreaWB_mm2=53.9, SizeX_mm=7.8, SizeY_mm=3.5, SizeZ_mm=3.5, VDC_V=12V
S2 S3 S5: library part CMP-0002233-1, "Switch, Dual SPDT,  2 Pos, 0.1A, 6VDC, SMD", CurrentRating_mA=100A, Manufacturer="Copal Electronics", Supplier Part Number 1=CASD20JCT-ND, Circuit=SPDT, ComponentLink1Description="Datasheet Link", ComponentLink1URL=http://www.nidec-copal-electronics.com/e/catalog/switch/cas.pdf, CompType=Switch, LatestRevisionDate=2017-03-09, MountType=SMT, Orientation="Top Actuated", PackageReference=5.4x3.9mm, PartNumber=CAS-D20TA, PositionCount=2, Publisher="Texas Instruments", RoHS=Y, Supplier 1=Digi-Key, SwitchFunction=On-On, VDC_V=6V
S4: library part CMP-0002123-2, "SLIDE SWITCH DPDT  .1A, SMT", CurrentRating_mA=100A, Manufacturer="Copal Electronics", Supplier Part Number 1=CAS220JCT-ND, Circuit=DPDT, ComponentLink1Description="Datasheet URL", ComponentLink1URL=http://copal-electronics.info/en/0008e/02462.pdf, CompType=Switch, LatestRevisionDate=2017-03-09, MountType=SMT, Orientation=Horizontal, PackageReference="SWITCH, 5.4x2.5x3.9mm", PartNumber=CAS-220TA, PositionCount=2, Publisher="Texas Instruments", RoHS=Y, Supplier 1=Digi-Key, SwitchFunction=On-On, VDC_V=6V
TP1 TP2 TP3 TP4 TP5 TP6 TP7 TP8: library part CMP-0078143-3, "TEST POINT.  No entry in BOM.", Manufacturer=N/A, CompType=Testpoint, PackageReference=N/A, PartNumber=N/A